# Altium PCB FPGA_Board.PcbDoc (part 6 of 10)
Units mm, origin at the board's own origin, x right, y up, seen from the top; angles counter-clockwise.
Board outline 103.63 x 86.08 mm, 2 copper layers (Top Layer, Bottom Layer); 109 components, 200 nets, 667 pads, 237 vias.
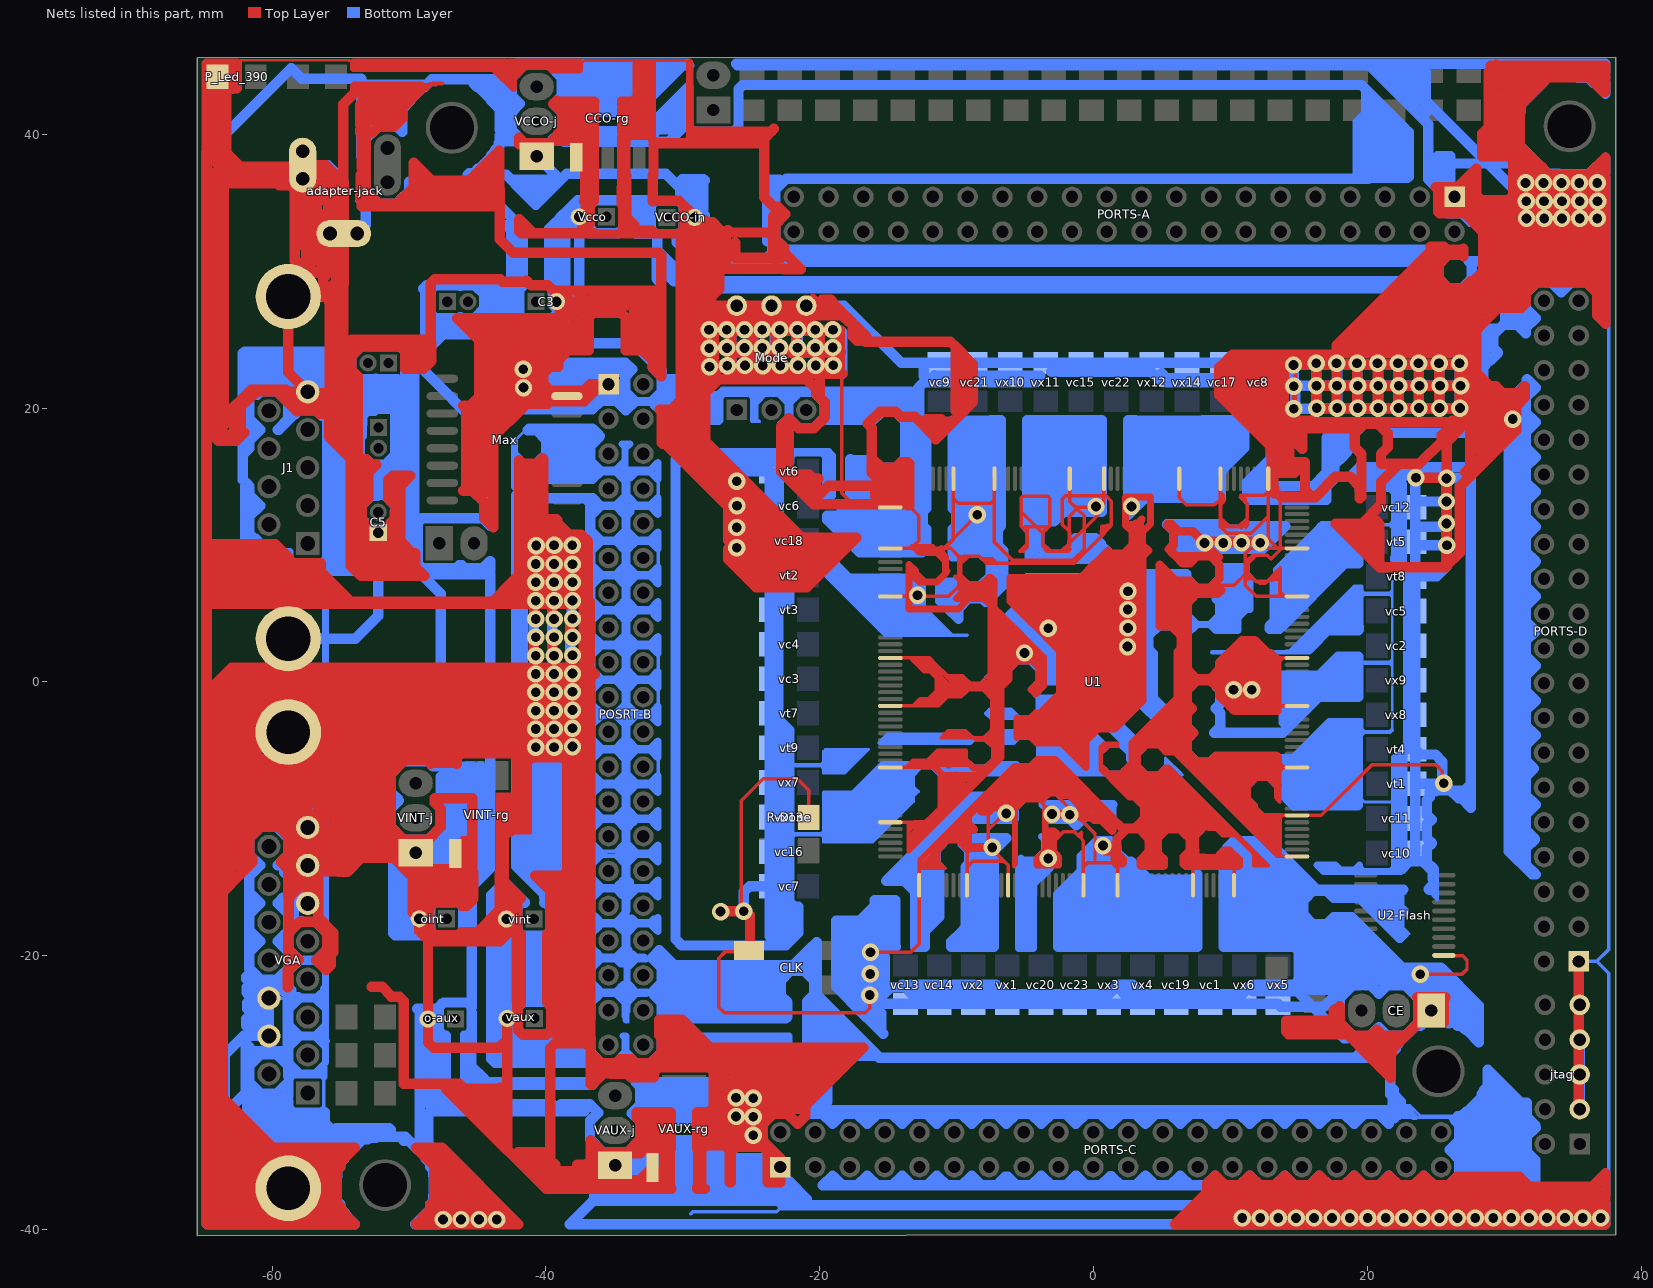
[diagram p6: the nets of this part, all layers, seen from the top]

## Via types
v1: diameter 1.27, hole 0.711, Top Layer to Bottom Layer, 237 vias

## Nets (pads, with @x,y where several pads share a name; then routed paths per layer and width w, separated by ;. In a path a pad name is that pad's centre, name@x,y a point inside that pad or via, vN(x,y) a via of type N, cw(c..) or ccw(c..) an arc to the next point about the centre after c; other vN are vias at no path point) (continued)
GND: (continued)
  Bottom Layer w0.254: VGA.11@-60.242,-23.095 -59.045,-23.095 -58.863,-22.913 -58.839,-22.889 -58.839,-22.841 -58.839,-20.943 -58.839,-19.707 -58.839,-18.742 -58.839,-18.173 -58.839,-16.937 -58.839,-16.422 -58.542,-16.125 -57.447,-16.125 VGA.6@-57.402,-16.17 ; VGA.17@-58.85,-3.693 VGA.17@-58.822,-3.665 ; -58.831,-30.611 -58.831,-29.173 ; -58.577,-30.341 -58.577,-29.038 ; -56.973,-31.195 -56.42,-31.195 -56.227,-31.002 -56.227,-29.038 -56.42,-28.845 ; -56.219,-28.848 -56.222,-28.845 -56.42,-28.845 ; v1(-41.645,21.497) -41.662,21.514 v1(-41.662,22.839) -41.176,22.353 -40.93,22.107 -35.786,22.107 POSRT-B.1@-35.429,21.75 ; -36.088,-18.022 -36.509,-18.443 -36.509,-19.337 -35.876,-19.97 -34.873,-19.97 -34.837,-20.006 -34.705,-20.138 ; VAUX-j.1@-34.95,-35.3 -34.95,-36.305 -34.95,-36.923 -34.491,-37.382 -33.967,-37.906 -33.86,-38.013 -24.381,-38.013 -24.274,-37.906 -23.423,-37.054 -22.882,-36.514 ; -33.969,-3.381 -33.969,-4.097 -33.336,-4.73 -32.352,-4.73 -31.924,-4.302 -31.834,-4.302 -31.809,-4.328 -31.809,-6.637 -32.149,-6.978 ; -33.642,-0.335 -33.969,-0.663 -33.969,-1.557 -33.336,-2.19 -32.352,-2.19 -32.096,-1.935 ; -33.633,14.914 -33.336,15.21 -32.442,15.21 -31.809,14.577 -31.809,13.503 -31.834,13.478 ; -33.561,2.285 -33.336,2.51 -32.442,2.51 -31.809,1.877 -31.809,0.237 -31.834,0.212 ; -33.467,10 -33.336,10.13 -32.442,10.13 -31.809,9.497 -31.809,8.603 -32.063,8.348 -32.063,8.169 ; -32.748,-0.03 -32.442,-0.03 -31.809,-0.663 -31.809,-1.557 -32.096,-1.845 -32.096,-1.935 ; -32.006,-1.935 -32.096,-1.935 ; -29.41,-38.85 -29.27,-38.71 -23.135,-38.71 -22.882,-38.457 -22.882,-38.028 -22.882,-37.378 ; PORTS-C.1@-22.882,-35.435 -22.882,-36.514 ; -17.314,-8.463 -15.085,-6.234 -12.779,-6.234 -12.635,-6.234 -12.537,-6.234 ; -7.885,-2.3 -7.592,-2.007 -6.033,-2.007 -5.882,-2.157 ; -3.397,-1.793 -3.856,-1.793 -3.903,-1.793 -4.084,-1.974 -4.675,-2.565 -5.221,-2.565 ; 14.878,8.896 16.62,10.638 16.62,11.085 16.62,11.28 16.62,11.639 19.612,11.639 19.766,11.485 21.966,11.485 22.372,11.485 ; 19.616,6.437 21.604,6.437 21.637,6.405 19.763,6.405 19.57,6.212 19.57,5.745 19.57,4.138 ; PORTS-A.1@26.36,35.429 27.896,35.429 29.47,33.855 29.979,33.346 ; 27.386,33.39 27.43,33.346 29.979,33.346 ; PORTS-D.1@35.433,-20.415 36.758,-20.415 ; 37.634,32.27 37.607,32.243 37.607,31.089 ; -58.831,-29.173 -58.712,-29.173 -58.577,-29.038 ; -58.831,-29.173 -58.831,-28.025 -58.831,-26.95 -58.831,-23.182 -58.59,-22.941 -58.574,-22.941 -58.574,-23.81 -58.574,-23.99 -58.577,-23.993 -58.577,-25.146 -58.577,-26.584 -58.577,-27.916 -58.577,-28.552 -58.577,-29.038 ; -58.577,-29.038 -58.384,-28.845 -56.42,-28.845 ; -22.882,-37.378 -22.882,-37.349 -22.882,-36.514 ; -22.882,-37.378 -22.299,-37.961 -21.898,-37.961 37.155,-37.961 37.631,-37.485 37.631,-21.288 36.758,-20.415 ; -5.882,-2.157 -5.882,-2.3 -5.882,-2.343 -5.882,-2.422 -5.847,-2.457 -5.619,-2.457 -5.583,-2.457 ; -5.882,-2.157 -5.74,-2.3 -5.583,-2.457 ; -5.583,-2.457 -5.475,-2.565 ; -5.475,-2.565 -5.221,-2.565 ; -5.475,-2.565 -5.449,-2.591 -5.425,-2.615 -5.171,-2.615 -5.195,-2.591 -5.221,-2.565 ; 19.57,4.138 19.57,3.787 19.596,3.76 ; 19.57,4.138 19.62,4.088 19.62,3.784 19.596,3.76 ; 19.596,3.76 19.57,3.734 19.57,3.687 19.62,3.737 19.596,3.76 ; 29.979,33.346 35.35,33.346 37.607,31.089 ; 36.758,-20.415 37.607,-19.566 37.607,31.089
  Bottom Layer w0.305: -36.778,-17.183 -36.535,-16.94 -36.535,-15.892 -35.887,-15.244 -34.971,-15.244 -34.506,-15.709 -34.506,-14.451 ; -35.641,0.136 -35.547,0.23 -35.109,0.23 ; -35.542,2.726 -35.352,2.536 ; -34.527,-0.255 -34.527,-0.049 -34.527,0.23 ; -34.486,2.446 -34.55,2.51 ; -34.323,11.597 -34.323,12.048 -34.971,12.696 -35.887,12.696 -36.535,12.048 -36.535,11.132 -36.193,10.79 -36.213,10.77 -36.234,10.77 -36.234,10.508 -36.234,10.132 -36.234,10.109 -36.535,9.809 -36.535,9.508 ; -33.564,2.971 -33.581,2.954 -33.772,2.763 -33.989,2.546 -33.999,2.536 -34.219,2.536 -34.55,2.536 ; -22.234,-11.048 -22.152,-11.131 -19.903,-11.131 -19.694,-10.922 -19.694,-8.083 -17.591,-8.083 -15.445,-5.937 -8.989,-5.937 -8.735,-6.191 -7.771,-6.191 -4.765,-6.191 -4.741,-6.167 -4.059,-5.485 -4.059,-4.665 -4.64,-4.084 -5.46,-4.084 -5.839,-4.463 -7.661,-4.463 -7.915,-4.209 -8.108,-4.209 ; -12.635,-6.234 -13.216,-6.815 -13.216,-6.887 -13.216,-7.635 -12.851,-8 -13.216,-8.365 -13.216,-8.724 -16.151,-11.659 -17.988,-11.659 -19.669,-11.659 -19.669,-11.353 -19.737,-11.286 -19.724,-11.286 -19.465,-11.027 -19.465,-8.301 -19.427,-8.263 -17.402,-8.263 -15.353,-6.214 -12.759,-6.214 -11.691,-6.214 -10.4,-6.214 -9.101,-6.214 -9.03,-6.285 -9.023,-6.292 -9.019,-6.296 -8.862,-6.296 -8.769,-6.389 -4.667,-6.389 -4.563,-6.285 -4.298,-6.02 ; -8.893,-4.057 -8.835,-4.116 -8.015,-4.116 ; -4.451,-6.02 -4.298,-6.02 ; 1.691,-6.641 1.935,-6.641 2.039,-6.537 ; 2.993,-5.023 3.269,-4.747 3.269,-4.646 ; 3.27,-4.646 3.503,-4.879 3.137,-5.245 2.892,-5.245 2.845,-5.198 2.686,-5.357 2.686,-5.415 2.686,-5.537 2.747,-5.476 2.76,-5.463 3.124,-5.463 3.309,-5.648 3.309,-5.29 3.785,-4.814 0.038,-1.067 -1.347,-1.067 -4.038,-1.067 -4.084,-1.114 -4.084,-1.974 -4.084,-2.01 -4.665,-2.591 -5.195,-2.591 -5.449,-2.591 -5.485,-2.591 -5.619,-2.457 -5.776,-2.3 -5.807,-2.268 -5.839,-2.3 -5.882,-2.343 -5.892,-2.353 -6.27,-2.353 -6.309,-2.392 -7.014,-2.392 -7.063,-2.343 -7.512,-2.343 -7.512,-2.3 -7.512,-2.285 -7.382,-2.155 -6.222,-2.155 -6.159,-2.092 -5.984,-2.092 -6.043,-2.033 -7.582,-2.033 -7.849,-2.3 -7.507,-2.642 0.228,-2.642 0.3,-2.642 2.008,-4.35 2.008,-4.732 2.516,-5.24 2.516,-5.245 2.516,-5.709 2.566,-5.759 3.03,-5.759 3.268,-5.759 3.309,-5.8 3.309,-5.987 3.258,-5.987 2.589,-5.987 2.359,-6.216 3.416,-6.216 3.608,-6.409 2.167,-6.409 2.039,-6.537 ; 15.77,2.137 8.689,2.137 8.663,2.163 14.255,2.163 14.697,2.605 15.02,2.605 15.915,2.605 ; 19.379,-3.605 19.429,-3.656 19.753,-3.656 ; 19.544,-2.787 19.544,-3.447 19.702,-3.605 19.753,-3.656 ; 21.767,-3.536 21.647,-3.656 19.753,-3.656 ; -36.535,1.888 -36.535,2.211 -36.535,3.189 -36.535,3.512 ; -36.535,1.888 -36.535,0.972 -35.887,0.324 -35.203,0.324 ; -36.535,1.888 -35.887,2.536 -35.352,2.536 ; -36.535,3.512 -36.535,4.428 ; -36.535,3.512 -35.887,2.864 -34.971,2.864 ; -36.535,4.428 -36.535,4.751 -36.535,5.703 -36.535,6.052 ; -36.535,4.428 -35.887,5.076 -34.971,5.076 -34.606,4.711 ; -36.535,6.052 -36.535,6.968 ; -36.535,6.052 -35.887,5.404 -34.914,5.404 -34.606,5.711 ; -36.535,6.968 -36.535,7.291 -36.535,8.269 -36.535,8.592 ; -36.535,6.968 -35.887,7.616 -34.971,7.616 -34.323,6.968 -34.323,5.995 -34.606,5.711 ; -36.535,8.592 -35.887,7.944 -34.971,7.944 -34.323,8.592 -34.323,9.508 -34.971,10.156 -35.887,10.156 -36.535,9.508 ; -36.535,8.592 -36.535,9.508 ; -35.887,-12.704 -35.558,-12.376 ; -35.887,-12.704 -36.535,-13.352 -36.535,-14.268 -35.887,-14.916 -35.885,-14.916 ; -35.887,-12.704 -34.971,-12.704 -34.323,-13.352 -34.323,-14.268 -34.506,-14.451 ; -35.885,-14.916 -36.047,-15.078 -36.411,-15.442 -36.407,-15.442 -36.1,-15.135 -35.82,-15.135 -35.665,-14.98 -35,-14.98 -35,-14.945 -34.971,-14.916 ; -35.885,-14.916 -34.971,-14.916 ; -35.558,-12.376 -35.887,-12.376 -36.535,-11.728 -36.535,-10.812 -35.887,-10.164 -34.971,-10.164 -34.323,-10.812 ; -35.558,-12.376 -34.971,-12.376 -34.323,-11.728 -34.323,-10.812 ; -35.352,2.536 -34.971,2.536 ; -35.203,0.324 -35.109,0.23 ; -35.203,0.324 -34.971,0.324 -34.527,0.768 ; -35.109,0.23 -34.527,0.23 ; -35.109,0.23 -34.323,-0.556 -34.323,-0.652 ; -34.971,-14.916 -34.763,-14.707 ; -34.971,-5.084 -34.971,-4.907 -34.971,-4.756 ; -34.971,-5.084 -35.887,-5.084 -36.535,-5.732 -36.535,-6.648 -35.887,-7.296 -34.971,-7.296 -34.559,-6.883 ; -34.971,-5.084 -34.323,-5.732 -34.323,-6.648 -34.559,-6.883 ; -34.971,-4.756 -34.323,-4.108 -34.323,-3.192 -34.971,-2.544 -35.559,-2.544 -35.645,-2.458 -35.731,-2.544 -35.887,-2.544 -36.535,-3.192 -36.535,-4.108 -35.887,-4.756 -34.971,-4.756 ; -34.971,2.536 -34.576,2.536 ; -34.971,2.536 -34.817,2.382 ; -34.971,2.864 -34.323,3.512 ; -34.971,2.864 -34.904,2.864 -34.803,2.763 -34.576,2.536 ; -34.817,2.382 -34.323,1.888 -34.323,0.972 -34.527,0.768 ; -34.817,2.382 -34.55,2.382 -34.55,2.51 ; -34.763,-14.707 -34.598,-14.543 ; -34.763,-14.707 -34.763,-15.201 -34.717,-15.247 -34.617,-15.147 -34.598,-15.147 -34.598,-14.543 ; -34.606,4.711 -34.606,5.625 -34.606,5.711 ; -34.606,4.711 -34.323,4.428 -34.323,3.512 ; -34.598,-14.543 -34.506,-14.451 ; -34.576,2.536 -34.55,2.51 ; -34.576,2.536 -34.55,2.536 ; -34.559,-8.037 -34.559,-7.725 -34.559,-6.883 ; -34.559,-8.037 -34.971,-7.624 -35.887,-7.624 -36.535,-8.272 -36.535,-9.188 -35.887,-9.836 -34.971,-9.836 -34.323,-9.188 ; -34.559,-8.037 -34.323,-8.272 -34.323,-9.188 ; -34.55,2.51 -34.55,2.536 ; -34.55,2.536 -34.55,2.763 -34.55,3.002 -34.323,3.229 -34.323,3.512 ; -34.527,0.23 -34.527,0.768 ; -34.323,-10.812 -34.323,-10.496 -34.323,-9.188 ; -34.323,-0.652 -34.971,-0.004 -35.887,-0.004 -36.535,-0.652 -36.535,-1.568 -35.887,-2.216 -34.971,-2.216 -34.323,-1.568 -34.323,-0.652 ; -15.568,-4.384 -8.91,-4.384 ; -15.568,-4.384 -15.437,-4.254 ; -15.568,-4.384 -15.647,-4.463 -8.989,-4.463 -8.91,-4.384 ; -15.437,-4.254 -9.013,-4.254 -8.907,-4.148 -8.907,-4.043 -15.227,-4.043 ; -15.437,-4.254 -15.227,-4.043 ; -15.227,-4.043 -15.045,-3.862 -9.165,-3.862 ; -9.165,-3.862 -9.106,-3.921 -9.03,-3.921 -9.089,-3.862 -9.165,-3.862 ; -8.91,-4.384 -8.735,-4.209 -8.108,-4.209 ; -8.108,-4.209 -8.015,-4.116 ; -8.015,-4.116 -7.507,-3.608 -7.211,-3.608 -7.211,-3.659 -7.648,-4.096 -7.648,-4.161 -7.561,-4.248 -7.555,-4.242 -5.945,-4.242 -5.686,-3.983 -5.677,-3.974 -6.365,-3.974 -7.374,-3.974 -7.041,-3.641 ; -7.041,-3.641 -7.065,-3.618 -7.065,-3.608 -5.687,-3.608 -5.586,-3.709 -5.397,-3.898 -4.743,-3.898 -4.658,-3.983 -3.958,-4.683 -3.886,-4.755 -3.886,-5.608 -4.298,-6.02 ; -7.041,-3.641 -6.913,-3.77 -6.907,-3.776 -6.563,-3.776 -5.659,-3.776 -5.726,-3.709 -5.811,-3.624 -7.024,-3.624 -7.041,-3.641 ; -4.298,-6.02 -3.976,-6.02 -1.666,-6.02 -0.261,-6.02 0.191,-6.02 0.433,-6.02 0.494,-6.02 1.115,-6.641 1.576,-6.641 1.678,-6.742 6.36,-6.742 5.291,-5.673 5.291,-5.972 5.807,-6.488 5.932,-6.488 5.969,-6.525 5.496,-6.525 5.186,-6.215 4.993,-6.407 5.086,-6.407 5.249,-6.57 4.831,-6.57 4.71,-6.691 3.89,-6.691 3.736,-6.537 2.039,-6.537
  Bottom Layer w0.508: -61.348,9.631 -60.896,9.631 ; -58.813,-28.408 -58.669,-28.552 -58.577,-28.552 -57.941,-28.552 ; -58.549,-21.016 -57.941,-20.408 ; -58.067,8.808 -58.436,8.808 ; -56.219,-28.848 -56.219,-27.909 ; -48.892,-34.882 -48.574,-35.2 -48.574,-35.323 -48.574,-35.476 -48.466,-35.584 -48.456,-35.594 ; -48.456,-35.427 -48.456,-35.594 ; -46.529,-30.747 -45.798,-30.747 -45.76,-30.709 -39.476,-30.709 -39.311,-30.874 -46.178,-30.874 ; -45.415,-23.028 -45.537,-23.15 -45.537,-23.631 -45.537,-25.439 -45.805,-25.707 -46.035,-25.707 -46.035,-29.409 -45.903,-29.541 -36.582,-29.541 -36.15,-29.109 -44.231,-29.109 ; -45.288,-24.11 -45.288,-25.81 ; -45.188,-28.152 -44.615,-28.725 ; -42.287,17.601 -42.287,15.41 -42.178,15.301 ; -40.132,-15.9 -40.132,-16.116 -40.132,-16.185 -39.806,-16.511 -39.806,-18.319 -39.806,-18.365 -39.806,-18.824 -39.806,-21.651 -39.913,-21.759 -40.392,-22.237 -41.129,-22.974 -41.482,-23.327 -41.52,-23.366 -41.915,-23.761 -41.915,-25.389 -41.52,-25.784 -41.445,-25.859 -39.178,-25.859 -38.494,-25.859 -38.367,-25.986 -37.748,-26.605 -37.234,-27.119 -36.636,-27.717 -36.439,-27.717 ; -37.268,13.541 -36.547,13.541 -35.929,12.923 -34.929,12.923 -34.597,13.255 ; -36.658,-5.023 -36.658,-5.532 -36.658,-6.668 -35.929,-7.397 -34.887,-7.397 -34.559,-7.725 -34.227,-8.057 -34.219,-8.057 ; -36.562,-9.908 -36.349,-9.908 -35.958,-9.908 -35.929,-9.937 -34.929,-9.937 -34.726,-9.734 -34.497,-9.734 -34.759,-9.996 -34.775,-9.996 -34.775,-10.044 -34.323,-10.496 -34.222,-10.597 -34.222,-11.77 -34.592,-12.14 -34.592,-12.483 -34.711,-12.602 -34.219,-13.094 ; -36.493,-4.837 -36.493,-4.622 -36.636,-4.479 -36.636,-4.33 -36.636,-3.15 -35.929,-2.443 -34.763,-2.443 ; -36.441,-4.846 -36.38,-4.907 -36.059,-4.907 -34.971,-4.907 -34.614,-4.907 ; -36.405,-18.158 -36.248,-18.002 ; -36.385,-17.102 -36.22,-17.267 ; -36.313,-20.606 -36.636,-20.93 -36.636,-21.93 -36.219,-22.347 ; -36.188,15.721 -35.929,15.463 -34.929,15.463 ; -35.711,10.383 -34.929,10.383 -34.575,10.737 ; -35.629,7.843 -34.929,7.843 -34.579,8.192 ; -35.536,5.303 -34.929,5.303 -34.606,5.625 -34.222,6.01 -34.222,7.01 -34.579,7.368 -34.579,8.192 ; -35.466,2.715 -35.418,2.763 -34.803,2.763 -34.55,2.763 -34.219,2.763 ; -34.772,0.196 -34.527,-0.049 -34.222,-0.354 -34.222,-1.61 -34.527,-1.915 -34.527,-2.181 -34.562,-2.146 -34.763,-2.347 -34.763,-2.443 ; -34.705,-20.138 -34.319,-20.138 -34.222,-20.041 -34.222,-19.892 -34.314,-19.8 -34.632,-19.8 ; -34.594,-22.302 -34.382,-22.09 -34.275,-22.09 -34.275,-22.124 -33.989,-22.41 -33.793,-22.606 -33.793,-22.393 -33.726,-22.326 ; -34.169,-27.145 -34.174,-27.15 -34.361,-27.15 ; -34.143,-24.69 -34.143,-24.101 ; -34.096,-14.31 -34.096,-13.31 -33.989,-13.203 -33.629,-12.843 ; -34.096,-10.77 -34.096,-11.77 -33.989,-11.877 -33.389,-12.477 -32.389,-12.477 -31.834,-11.922 -31.834,-13.158 -32.223,-12.769 ; -33.989,-14.417 -33.83,-14.576 -33.83,-15.132 -33.715,-15.017 -32.221,-15.017 -32.214,-15.01 -32.214,-14.842 -31.834,-14.462 -31.834,-15.698 -32.389,-15.143 -33.389,-15.143 -33.989,-15.743 -34.096,-15.85 ; -33.989,-10.663 -33.811,-10.485 -33.811,-10.021 -33.579,-10.253 -33.389,-10.063 -32.369,-10.063 -32.167,-10.265 -32.167,-10.285 -31.834,-10.618 -31.834,-9.382 -32.389,-9.937 -33.389,-9.937 -33.989,-9.337 -34.096,-9.23 -34.096,-8.23 -33.989,-8.123 -33.801,-7.935 ; -33.772,2.763 -33.989,2.763 -34.219,2.763 ; -33.721,-17.226 -33.958,-17.226 -33.989,-17.257 -34.368,-17.636 -34.492,-17.636 -34.492,-17.573 -34.718,-17.347 ; -25.158,16.816 -19.342,16.816 -19.207,16.681 ; -22.234,16.517 -22.062,16.689 -22.019,16.732 -19.861,16.732 -19.593,16.464 -19.593,13.435 -19.217,13.435 -19.059,13.592 -19.059,16.533 -19.207,16.681 ; -19.363,13.711 -19.207,13.867 -19.207,16.681 ; -15.001,6.16 -15.001,6.097 -14.808,5.904 ; -13.366,-6.401 -12.946,-6.401 -12.779,-6.234 -12.759,-6.214 -12.677,-6.133 -11.773,-6.133 -11.691,-6.214 -11.62,-6.285 -11.265,-6.641 -11.115,-6.641 -10.966,-6.492 -9.142,-6.492 -8.993,-6.641 ; v1(-12.866,6.339) v1@-12.484,5.957 ; -11.097,-6.641 -8.993,-6.641 ; v1(-5.046,2.11) -4.526,2.63 -4.094,3.062 -3.539,3.617 -3.32,3.836 v1(-3.32,3.911) ; v1(-3.324,-12.891) -2.917,-12.484 -2.917,-12.377 ; v1(2.769,12.818) 3.264,13.313 3.623,13.313 9.412,13.313 9.412,13.861 9.285,13.988 8.451,14.822 ; 7.066,3.865 7.246,3.865 7.573,4.192 8.477,4.192 8.931,3.738 10.542,3.738 10.533,3.748 10.533,4.652 11.173,5.292 11.437,5.292 11.437,7.594 11.183,7.848 11.183,8.416 11.158,8.441 9.117,8.441 9.117,7.573 8.863,7.319 8.863,6.006 9.117,5.752 9.117,4.848 8.703,4.433 ; 7.454,4.326 7.573,4.208 8.477,4.208 8.687,4.417 ; 8.731,-5.513 13.21,-5.513 ; 14.665,-6.968 13.961,-6.264 13.51,-5.813 13.337,-5.64 13.21,-5.513 ; 15.037,-5.049 14.572,-5.513 14.357,-5.513 13.21,-5.513 ; 19.062,6.126 19.304,6.126 19.316,6.137 19.616,6.437 ; 22.412,-13.739 22.294,-13.857 21.689,-13.857 ; vt4.1@22.834,-4.156 22.834,-4.742 22.067,-5.509 21.957,-5.509 21.957,-8.785 21.957,-13.589 21.689,-13.857 ; -60.896,9.631 -60.878,9.649 -60.48,9.649 -60.414,9.649 -60.357,9.706 ; -60.896,9.631 -61.177,9.35 -60.517,9.35 ; -60.896,9.631 -60.798,9.631 -60.517,9.35 ; -60.691,10.04 -60.871,10.04 -61.006,10.04 -61.159,9.887 -61.159,10.328 -61.159,10.57 -60.781,10.193 -60.759,10.193 -60.759,10.108 -60.691,10.04 ; -60.691,10.04 -60.357,9.706 ; -60.517,9.35 -60.218,9.35 -60.175,9.307 -59.681,9.307 -59.773,9.399 -59.9,9.526 ; -60.357,9.706 -60.177,9.526 -59.9,9.526 ; -59.9,9.526 -59.569,9.526 ; -59.569,9.526 -58.704,9.526 -58.704,9.076 ; -59.569,9.526 -59.222,9.179 -58.953,9.179 -58.941,9.191 -58.82,9.191 -58.704,9.076 ; -58.704,9.076 -58.436,8.808 ; -58.436,8.808 -58.309,8.681 -57.744,8.115 -56.1,6.471 -56.1,3.155 -56.1,-18.252 ; -58.281,-17.977 -58.281,-17.207 ; -58.281,-17.977 -57.941,-17.638 -56.863,-17.638 -56.1,-18.401 ; -58.281,-17.977 -58.704,-18.401 -58.704,-19.479 -57.941,-20.242 ; -58.281,-17.207 -58.281,-16.322 -58.44,-16.322 -58.599,-16.481 -58.403,-16.481 -58.348,-16.536 -58.348,-17.14 -58.281,-17.207 ; -58.281,-17.207 -58.134,-17.354 -57.817,-17.354 -57.694,-17.477 -56.906,-17.477 -56.808,-17.379 -56.344,-17.379 -56.375,-17.41 -56.375,-17.483 -56.436,-17.544 -56.436,-17.916 -56.1,-18.252 ; -58.196,-26.203 -57.941,-25.948 -57.14,-25.948 ; -58.196,-26.203 -58.242,-26.157 -58.242,-25.571 -58.153,-25.571 ; -58.196,-26.203 -58.577,-26.584 -58.704,-26.711 -58.704,-27.789 -58.577,-27.916 -57.941,-28.552 ; -58.18,-23.416 -57.941,-23.178 -56.863,-23.178 -56.1,-23.941 ; -58.18,-23.416 -58.226,-23.416 -58.226,-23.111 -58.34,-22.997 -58.247,-22.904 -58.05,-22.904 -57.941,-23.012 -56.754,-23.012 -56.515,-22.773 -56.318,-22.97 -56.318,-23.248 -56.256,-23.31 -56.256,-22.406 -56.1,-22.249 ; -58.18,-23.416 -58.574,-23.81 -58.704,-23.941 -58.704,-25.019 -58.577,-25.146 -58.153,-25.571 ; -58.153,-25.571 -57.941,-25.782 -57.306,-25.782 ; -57.941,-28.552 -56.863,-28.552 ; -57.941,-20.408 -57.456,-20.408 ; -57.941,-20.408 -58.252,-20.408 -58.318,-20.342 -58.218,-20.242 -57.941,-20.242 ; -57.941,-20.242 -57.622,-20.242 ; -57.622,-20.242 -56.863,-20.242 -56.1,-19.479 ; -57.622,-20.242 -57.456,-20.408 ; -57.456,-20.408 -56.863,-20.408 -56.438,-20.833 ; -57.306,-25.782 -57.166,-25.782 ; -57.306,-25.782 -57.236,-25.852 ; -57.236,-25.852 -57.166,-25.782 ; -57.236,-25.852 -57.14,-25.948 ; -57.166,-25.782 -56.863,-25.782 ; -57.14,-25.948 -56.863,-25.948 -56.1,-26.711 ; -56.863,-28.552 -56.244,-27.933 ; -56.863,-28.552 -56.497,-28.552 -56.419,-28.63 -56.244,-28.455 -56.244,-27.933 ; -56.863,-25.782 -56.277,-25.197 ; -56.863,-25.782 -56.678,-25.782 ; -56.678,-25.782 -56.472,-25.782 -56.1,-26.154 ; -56.678,-25.782 -56.451,-25.555 -56.277,-25.729 -56.277,-25.197 ; -56.438,-20.833 -56.1,-21.171 ; -56.438,-20.833 -56.438,-19.873 -56.1,-19.535 ; -56.277,-25.197 -56.1,-25.019 ; -56.244,-27.933 -56.219,-27.909 ; -56.219,-27.909 -56.1,-27.789 -56.1,-26.711 ; -56.1,-26.711 -56.1,-26.286 ; -56.1,-26.286 -56.1,-26.154 ; -56.1,-26.286 -56.034,-26.22 -56.1,-26.154 ; -56.1,-26.154 -56.1,-25.019 ; -56.1,-25.019 -56.1,-23.941 ; -56.1,-23.941 -56.1,-22.249 ; -56.1,-22.249 -56.1,-21.171 ; -56.1,-21.171 -56.1,-19.535 ; -56.1,-19.535 -56.1,-19.479 ; -56.1,-19.479 -56.1,-18.401 ; -56.1,-18.401 -56.1,-18.252 ; -48.456,-35.594 -48.379,-35.671 ; -48.379,-37.907 -48.379,-37.492 -48.313,-37.426 ; -48.379,-37.907 -48.313,-37.841 ; -48.379,-37.907 -48.574,-38.102 -48.574,-38.379 -48.313,-38.117 -48.313,-37.841 ; -48.379,-35.671 -48.313,-35.737 -48.313,-36.12 ; -48.379,-35.671 -48.379,-36.054 -48.313,-36.12 ; -48.313,-37.841 -48.313,-37.426 ; -48.313,-37.426 -48.313,-37.058 -48.313,-36.12 ; -45.288,-25.81 -45.288,-26.417 -45.323,-26.452 -45.323,-28.725 -44.615,-28.725 ; -45.288,-25.81 -45.69,-26.212 -45.69,-29.092 -45.627,-29.029 -45.627,-28.984 -45.502,-29.109 -44.231,-29.109 ; -44.615,-28.725 -44.231,-29.109 ; -36.439,-27.717 -36.109,-27.717 -35.631,-27.717 ; -36.439,-27.717 -36.536,-27.814 -36.663,-27.941 -35.407,-27.941 ; -36.248,-18.002 -36.248,-17.295 -36.22,-17.267 ; -36.248,-18.002 -35.929,-17.683 -34.929,-17.683 -34.373,-18.239 ; -36.22,-17.267 -35.929,-17.557 -34.929,-17.557 -34.718,-17.347 ; -36.219,-22.347 -36.272,-22.347 -36.272,-23.052 -36.3,-23.08 -36.246,-23.08 -35.929,-22.763 -34.929,-22.763 -34.59,-23.102 -34.59,-23.014 -34.366,-23.014 -34.356,-23.004 -34.143,-23.217 -34.143,-24.101 ; -36.219,-22.347 -35.929,-22.637 -34.929,-22.637 ; -35.631,-27.717 -35.407,-27.941 ; -35.631,-27.717 -34.929,-27.717 ; -35.407,-27.941 -32.613,-27.941 ; -34.929,-27.717 -34.791,-27.579 ; -34.929,-27.717 -34.233,-27.717 ; -34.929,-22.637 -34.779,-22.487 -34.601,-22.487 ; -34.929,-22.637 -34.751,-22.637 -34.601,-22.487 ; -34.929,15.463 -34.219,15.463 ; -34.929,15.463 -34.222,16.17 -34.222,17.17 -34.443,17.391 -33.875,17.391 -34.219,17.047 -34.219,15.463 ; -34.791,-27.579 -34.095,-27.579 ; -34.791,-27.579 -34.361,-27.15 ; -34.763,-2.443 -34.271,-2.443 -34.219,-2.391 ; -34.763,-2.443 -34.763,-2.496 -34.222,-3.037 -34.222,-4.15 -34.614,-4.542 -34.614,-4.907 ; -34.718,-17.347 -34.222,-16.85 ; -34.632,-19.8 -34.372,-19.54 ; -34.632,-19.8 -34.837,-20.006 -34.929,-20.097 -35.929,-20.097 -36.329,-19.697 -36.329,-20.118 -36.284,-20.163 -36.284,-20.578 -35.929,-20.223 -34.929,-20.223 -34.561,-20.591 -34.281,-20.591 -33.989,-20.299 -33.808,-20.118 -33.808,-20.036 -33.629,-19.857 -33.389,-20.097 -32.824,-20.097 -32.709,-20.212 -32.709,-20.223 -33.389,-20.223 -33.989,-20.823 -34.096,-20.93 -34.096,-21.93 -33.989,-22.037 -33.726,-22.3 -33.726,-22.326 ; -34.614,-4.907 -34.614,-5.092 -34.219,-5.487 ; -34.614,-4.907 -34.219,-4.907 ; -34.601,-22.487 -34.469,-22.619 -34.262,-22.619 -33.989,-22.892 -33.946,-22.935 -33.946,-23.32 ; -34.597,13.255 -34.597,12.465 -34.222,12.09 -34.222,11.09 -34.575,10.737 ; -34.597,13.255 -34.222,13.63 -34.222,14.415 -34.222,14.703 -34.219,14.706 ; -34.579,8.192 -34.222,8.55 -34.222,9.55 -34.575,9.903 -34.575,10.737 ; -34.373,-18.239 -34.222,-18.39 -34.222,-19.39 -34.372,-19.54 ; -34.373,-18.239 -34.373,-18.187 -33.989,-17.803 -33.714,-17.528 -33.595,-17.409 -33.538,-17.409 -33.389,-17.557 -32.389,-17.557 -32.142,-17.311 -32.12,-17.333 -32.12,-17.457 -31.865,-17.202 -31.834,-17.202 -31.834,-18.238 -32.389,-17.683 -33.389,-17.683 -33.989,-18.283 -34.096,-18.39 -34.096,-19.39 -33.989,-19.497 -33.946,-19.54 -33.989,-19.54 -34.372,-19.54 ; -34.361,-27.15 -34.222,-27.01 -34.222,-26.01 -34.373,-25.859 -34.154,-25.859 -34.154,-26.952 -33.389,-27.717 ; -34.233,-27.717 -34.095,-27.579 ; -34.233,-27.717 -33.389,-27.717 ; -34.222,-16.85 -34.222,-15.976 -34.219,-15.973 ; -34.222,-16.85 -34.219,-16.847 ; -34.219,-16.847 -34.219,-15.973 ; -34.219,-16.847 -34.096,-16.724 -34.096,-15.85 ; -34.219,-15.973 -34.219,-13.094 ; -34.219,-15.973 -34.096,-15.85 ; -34.219,-13.094 -34.219,-8.057 ; -34.219,-8.057 -34.219,-5.487 ; -34.219,-5.487 -34.219,-4.907 ; -34.219,-5.487 -34.096,-5.61 -34.096,-5.69 ; -34.219,-4.907 -34.219,-2.391 ; -34.219,-4.907 -33.989,-4.907 -33.824,-4.907 ; -34.219,-2.391 -34.219,0.537 ; -34.219,0.537 -34.219,2.536 -34.219,2.763 ; -34.219,0.537 -33.989,0.537 -33.703,0.537 ; -34.219,2.763 -34.219,14.412 -34.219,14.706 ; -34.219,14.706 -34.219,15.157 ; -34.219,14.706 -34.67,15.157 -34.219,15.157 ; -34.219,14.706 -34.096,14.583 -34.096,14.289 -34.096,13.63 -33.989,13.523 -33.389,12.923 -32.389,12.923 -31.834,13.478 -31.834,12.242 -32.4,12.808 -33.793,12.808 -33.79,12.805 -33.79,12.397 -33.989,12.197 -34.096,12.09 -34.096,11.09 -33.989,10.983 -33.389,10.383 -32.389,10.383 -31.834,10.938 -31.834,9.702 -32.199,10.068 -32.199,10.098 -32.075,10.222 -32.354,10.222 -32.389,10.257 -33.389,10.257 -33.662,9.985 -33.662,10.288 -33.78,10.406 -33.865,10.321 -33.865,9.781 -33.989,9.657 -34.096,9.55 -34.096,8.55 -33.989,8.443 -33.389,7.843 -32.389,7.843 -32.063,8.169 -31.834,8.398 -31.834,7.162 -32.15,7.478 ; -34.219,15.157 -34.219,15.463 ; -34.219,15.157 -34.105,15.157 -33.837,14.889 -33.389,15.337 -32.389,15.337 -31.834,14.782 -31.834,16.018 -32.389,15.463 -34.219,15.463 ; -34.143,-24.101 -34.096,-24.055 -34.096,-23.47 -33.989,-23.363 -33.946,-23.32 ; -34.096,-5.69 -33.989,-5.583 -33.824,-5.418 ; -34.096,-5.69 -34.096,-6.69 -33.989,-6.797 -33.389,-7.397 -32.389,-7.397 -31.834,-6.842 -31.834,-8.078 -32.389,-7.523 -33.389,-7.523 -33.576,-7.71 ; -34.095,-27.579 -34.075,-27.559 -33.918,-27.559 -33.898,-27.579 -34.095,-27.579 ; -33.946,-23.32 -33.389,-22.763 -32.665,-22.763 -32.593,-22.691 -32.593,-22.637 -33.415,-22.637 -33.726,-22.326 ; -33.85,2.176 -33.85,2.609 -33.634,2.393 ; -33.85,2.176 -33.634,2.393 ; -33.85,2.176 -33.989,2.037 -34.096,1.93 -34.096,0.93 -33.989,0.823 -33.703,0.537 ; -33.824,-5.418 -33.824,-4.907 ; -33.824,-5.418 -33.569,-5.162 ; -33.824,-4.907 -33.569,-5.162 ; -33.801,-7.935 -33.801,-7.466 -33.576,-7.691 -33.576,-7.71 ; -33.801,-7.935 -33.576,-7.71 ; -33.798,-2.852 -33.728,-2.781 ; -33.798,-2.852 -33.989,-3.043 -34.096,-3.15 -34.096,-4.15 -33.989,-4.257 -33.389,-4.857 -32.389,-4.857 -31.834,-4.302 -31.834,-5.538 -32.207,-5.165 ; -33.798,-2.852 -33.798,-2.33 -33.728,-2.4 -33.728,-2.781 ; -33.779,7.328 -33.78,7.329 -33.78,7.759 -33.564,7.543 ; -33.779,7.328 -33.564,7.543 ; -33.779,7.328 -33.989,7.117 -34.096,7.01 -34.096,6.01 -33.989,5.903 -33.389,5.303 -32.389,5.303 -31.834,5.858 -31.834,4.622 -32.115,4.903 -32.115,5.029 -32.263,5.177 -33.389,5.177 -33.672,4.895 -33.789,5.012 -33.789,5.279 -33.819,5.249 -33.819,4.747 -33.989,4.577 -34.096,4.47 -34.096,3.47 -33.989,3.363 -33.581,2.954 -33.389,2.763 -32.389,2.763 -31.834,3.318 -31.834,2.082 -32.207,2.455 ; -33.728,-2.781 -33.389,-2.443 -32.389,-2.443 ; -33.703,0.537 -33.389,0.223 -32.389,0.223 -31.834,0.778 -31.834,0.212 -31.834,-0.458 -32.172,-0.12 -32.172,-0.038 -32.307,0.097 -33.389,0.097 -33.637,-0.15 -33.637,0.004 -33.837,0.204 -33.837,-0.351 -33.989,-0.503 -34.096,-0.61 -34.096,-1.61 -33.989,-1.717 -33.389,-2.317 -32.389,-2.317 -32.006,-1.935 -31.834,-1.762 -31.834,-2.998 -32.102,-2.73 ; -33.634,2.393 -33.389,2.637 -32.389,2.637 ; -33.629,-12.843 -33.83,-12.642 -33.83,-12.483 -33.71,-12.603 -33.389,-12.603 ; -33.629,-12.843 -33.389,-12.603 ; -33.569,-5.162 -33.389,-4.983 -32.389,-4.983 -32.233,-5.139 ; -33.564,7.543 -33.389,7.717 -32.389,7.717 -32.256,7.584 ; -33.389,-27.717 -32.389,-27.717 ; -33.389,-12.603 -32.389,-12.603 ; -32.613,-27.941 -26.129,-27.941 ; -32.613,-27.941 -32.389,-27.717 ; -32.389,-27.717 -32.211,-27.539 ; -32.389,-12.603 -32.223,-12.769 ; -32.389,-12.603 -32.384,-12.603 -32.223,-12.764 -32.223,-12.769 ; -32.389,-2.443 -32.102,-2.73 ; -32.389,-2.443 -32.208,-2.443 -32.102,-2.549 -32.102,-2.73 ; -32.389,2.637 -32.207,2.455 ; -32.389,2.637 -32.379,2.637 -32.207,2.465 -32.207,2.455 ; -32.256,7.584 -32.15,7.584 -32.15,7.478 ; -32.256,7.584 -32.15,7.478 ; -32.233,-5.139 -32.207,-5.139 -32.207,-5.165 ; -32.233,-5.139 -32.207,-5.165 ; -32.211,-27.539 -31.616,-27.539 -31.616,-26.497 -31.409,-26.29 -27.78,-26.29 ; -32.211,-27.539 -31.682,-27.01 -31.682,-26.01 -31.776,-25.916 ; -31.776,-25.916 -31.833,-25.859 -31.776,-25.859 ; -31.776,-25.916 -31.776,-25.859 ; -31.776,-25.859 -28.211,-25.859 ; -28.211,-25.859 -27.78,-26.29 ; -28.211,-25.859 -22.232,-25.859 -22.232,-31.783 -22.377,-31.638 ; -27.78,-26.29 -27.298,-26.772 ; -27.78,-26.29 -22.692,-26.29 -22.682,-26.3 -22.682,-27.657 ; -27.298,-26.772 -26.914,-27.156 ; -27.298,-26.772 -23.095,-26.772 -23.006,-26.683 -23.006,-27.373 ; -27.298,-26.772 -31.222,-26.772 -31.222,-27.441 -31.301,-27.52 -31.164,-27.657 -26.413,-27.657 ; -26.914,-27.156 -26.531,-27.539 ; -26.914,-27.156 -23.223,-27.156 -23.006,-27.373 ; -26.914,-27.156 -30.829,-27.156 -30.966,-27.293 -30.72,-27.539 -26.531,-27.539 ; -26.531,-27.539 -26.413,-27.657 ; -26.531,-27.539 -22.967,-27.539 -23.006,-27.5 -23.006,-27.373 ; -26.413,-27.657 -26.129,-27.941 ; -26.413,-27.657 -23.41,-27.657 -22.829,-28.238 -22.593,-28.238 -22.682,-28.149 -22.682,-27.657 ; -26.129,-27.941 -23.359,-27.941 -22.417,-28.883 -22.417,-31.598 ; -23.006,-27.373 -22.722,-27.657 -22.682,-27.657 ; -22.682,-27.657 -22.377,-27.657 -22.377,-31.638 ; -22.417,-31.598 -22.377,-31.638 ; -22.417,-31.598 -22.417,-31.653 -22.377,-31.693 -22.377,-31.638 ; -14.808,5.904 -13.965,5.904 -13.901,5.84 -14.016,5.725 -14.016,5.303 -14.207,5.303 -14.808,5.904 ; -14.808,5.904 -15.091,5.904 -14.401,5.214 -14.284,5.214 -14.13,5.06 -13.824,5.06 -13.824,6.135 -13.913,6.224 -15.065,6.224 -15.845,6.224 -14.451,4.83 -13.389,4.83 -13.53,4.971 -13.53,6.442 -13.645,6.557 -15.398,6.557 -16.6,6.557 -14.732,4.689 -14.451,4.689 -14.221,4.459 -12.903,4.459 -13.21,4.766 -13.21,6.928 -15.769,6.928 -17.667,6.928 -17.675,6.928 -17.649,6.902 -17.641,6.902 -17.368,6.902 -14.834,4.368 -14.605,4.139 -12.186,4.139 -12.415,4.368 -12.903,4.856 -12.903,7.184 -13.031,7.312 -16.153,7.312 -17.88,7.312 -19.287,8.719 -19.373,8.633 -19.505,8.501 -19.505,8.335 -19.351,8.335 -14.822,3.806 -11.418,3.806 -11.98,4.368 -12.484,4.872 -12.484,5.383 ; -12.484,5.383 v1@-12.484,5.957 ; -12.484,5.383 -11.469,4.368 -10.639,3.538 -15.195,3.538 -19.593,7.936 -19.593,8.854 -19.593,9.432 -17.797,7.636 -16.477,7.636 -12.706,7.636 -12.484,7.415 v1@-12.484,5.957 ; -8.993,-6.641 -1.182,-6.641 ; -8.777,-6.292 -8.784,-6.285 -9.031,-6.038 -10.576,-6.038 -10.4,-6.214 -10.329,-6.285 -10.322,-6.292 -9.023,-6.292 -8.777,-6.292 ; -8.777,-6.292 -7.873,-6.292 ; -7.873,-6.292 -7.866,-6.285 -7.771,-6.191 -7.619,-6.038 -5.631,-6.038 -5.502,-6.167 -4.741,-6.167 -4.598,-6.167 ; -7.873,-6.292 -4.723,-6.292 -4.716,-6.285 -4.598,-6.167 ; -4.619,-3.709 -3.793,-4.535 -3.793,-5.811 -3.78,-5.824 -3.976,-6.02 -4.191,-6.235 -4.262,-6.235 -4.217,-6.28 -1.406,-6.28 ; -4.619,-3.709 -3.977,-3.709 ; -4.619,-3.709 -5.586,-3.709 -5.726,-3.709 -6.63,-3.709 -6.563,-3.776 -6.365,-3.974 -6.356,-3.983 -5.686,-3.983 -4.658,-3.983 -4.598,-3.983 -3.958,-4.623 -3.958,-4.683 -3.958,-5.527 -4.451,-6.02 -4.598,-6.167 ; -4.349,-13.734 -4.009,-13.394 -3.773,-13.394 -3.773,-13.472 -3.644,-13.601 -3.777,-13.734 ; -4.349,-13.734 -4.759,-14.144 -4.897,-14.006 -4.897,-13.798 -4.656,-13.798 -4.592,-13.734 -4.349,-13.734 ; -4.349,-13.734 -3.777,-13.734 ; -3.977,-3.709 -0.142,-3.709 0.89,-4.741 0.433,-5.198 ; -3.977,-3.709 -3.613,-4.073 ; -3.777,-13.734 -4.537,-14.494 -4.774,-14.494 -4.799,-14.519 -4.799,-19.17 -5.065,-19.17 -5.1,-19.205 -5.174,-19.131 -5.174,-13.399 -4.207,-13.399 -3.284,-12.476 -3.284,-11.475 -2.92,-11.475 -2.917,-11.473 ; -3.777,-13.734 -3.738,-13.734 -3.529,-13.943 ; -3.613,-4.073 -0.02,-4.073 -0.02,-4.284 0.455,-4.759 0.455,-5.153 0.433,-5.175 0.433,-5.198 ; -3.613,-4.073 -3.832,-4.073 -3.447,-4.458 -3.447,-5.85 -1.836,-5.85 ; -3.613,-4.073 -3.139,-4.547 ; -3.529,-13.943 -2.663,-13.078 -2.663,-12.631 -2.917,-12.377 ; -3.529,-13.943 -4.388,-14.803 -4.388,-19.463 -5.484,-19.463 -5.484,-13.069 -5.292,-12.877 -5.152,-13.017 -4.248,-13.017 -3.608,-12.377 -3.608,-11.473 -3.796,-11.284 -2.729,-11.284 -2.917,-11.473 ; -3.139,-4.547 -3.139,-4.425 -3.075,-4.361 -2.966,-4.47 -0.347,-4.47 -0.347,-4.561 ; -3.139,-4.547 -3.139,-5.414 -2.272,-5.414 ; -3.139,-4.547 -2.792,-4.894 ; -2.917,-12.377 -2.917,-11.473 ; -2.792,-4.894 -2.792,-4.817 -2.779,-4.804 -0.842,-4.804 -0.723,-4.923 ; -2.792,-4.894 -2.792,-4.951 -2.85,-5.009 -2.677,-5.009 ; -2.792,-4.894 -2.677,-5.009 ; -2.677,-5.009 -0.996,-5.009 -0.938,-5.067 -0.867,-5.067 -0.723,-4.923 ; -2.677,-5.009 -2.272,-5.414 ; -2.272,-5.414 -1.085,-5.414 -1.021,-5.478 -0.752,-5.478 -0.335,-5.061 -0.585,-5.061 -0.723,-4.923 ; -2.272,-5.414 -1.836,-5.85 ; -1.836,-5.85 -0.791,-5.85 -0.259,-5.318 0.038,-5.318 0.076,-5.28 0.076,-4.99 -0.347,-4.567 -0.347,-4.561 ; -1.836,-5.85 -1.666,-6.02 -1.406,-6.28 ; -1.406,-6.28 -1.401,-6.285 -1.092,-6.594 -1.135,-6.594 -1.182,-6.641 ; -1.406,-6.28 -0.521,-6.28 -0.261,-6.02 0.191,-5.568 ; -1.182,-6.641 -0.704,-6.641 -0.324,-6.641 ; -0.723,-4.923 -0.354,-4.554 -0.347,-4.561 ; -0.347,-4.561 0.361,-5.269 ; -0.324,-6.641 0.191,-6.126 0.191,-6.02 0.191,-5.568 ; -0.324,-6.641 0.023,-6.641 ; 0.023,-6.641 0.301,-6.363 0.693,-6.363 ; 0.023,-6.641 0.447,-6.641 ; 0.191,-5.568 0.426,-5.333 ; 0.191,-5.568 0.191,-5.439 0.361,-5.269 ; 0.361,-5.269 0.426,-5.333 ; 0.361,-5.269 0.433,-5.198 ; 0.426,-5.333 0.433,-5.341 0.433,-6.02 0.433,-6.102 0.693,-6.363 ; 0.426,-5.333 0.433,-5.326 0.433,-5.198 ; 0.447,-6.641 0.709,-6.379 ; 0.447,-6.641 0.971,-6.641 0.709,-6.379 ; 0.693,-6.363 0.709,-6.379 ; 8.687,4.417 9.053,4.051 10.14,4.051 10.14,4.433 ; 8.687,4.417 8.703,4.433 ; 8.703,4.433 10.14,4.433 ; 10.14,4.433 10.14,4.5 10.157,4.517 9.22,4.517 9.423,4.72 9.423,5.012 10.151,5.012 ; 10.14,4.433 10.313,4.433 10.151,4.595 10.151,5.012 ; 10.151,5.012 10.151,5.346 ; 10.151,5.012 10.372,5.012 10.384,5 11.011,5.627 11.13,5.627 11.13,7.382 10.79,7.722 10.79,8.002 10.742,8.05 9.549,8.05 9.549,7.442 9.19,7.083 9.19,6.104 9.37,5.924 9.37,5.346 10.151,5.346 ; 10.151,5.346 10.151,5.703 ; 10.151,5.346 10.187,5.346 10.229,5.304 10.246,5.304 10.784,5.842 10.784,7.108 10.342,7.55 10.342,7.644 10.318,7.668 9.943,7.668 9.943,7.268 9.537,6.862 9.537,6.17 9.62,6.087 9.62,5.788 9.716,5.692 10.14,5.692 10.151,5.703 ; 10.151,5.703 10.151,6.045 10.038,6.045 9.984,5.991 9.865,6.11 9.865,6.23 9.895,6.26 9.895,6.911 10.175,7.191 10.361,7.005 10.665,7.005 10.457,6.797 10.414,6.797 10.384,6.767 10.384,5.936 10.151,5.703 ; 19.711,-13.857 21.689,-13.857 ; 19.711,-13.857 16.787,-13.857 16.314,-13.384 17.665,-13.384 18.023,-13.742 19.06,-13.742 19.418,-13.384 19.418,-13.564 19.711,-13.857
  Bottom Layer w0.635: v1(-3.042,-9.656) v1@-1.775,-9.656 ; v1@-2.591,-9.373 -2.531,-9.433 1.369,-9.433 ; v1@-2.021,-10.052 -3.469,-10.052 -3.469,-9.171 -3.693,-8.948 1.443,-8.948 1.369,-9.021 1.369,-9.433 ; v1@7.811,9.673 10.801,9.673 11.668,9.673 11.885,9.456 11.949,9.519 12.161,9.731 v1(12.161,10.17) v1(10.801,10.17) ; v1(8.102,10.147) v1(9.463,10.147) ; v1(10.222,-0.567) 10.236,-0.581 v1(11.55,-0.581) ; v1@-1.775,-9.656 0.178,-9.656 0.296,-9.774 ; v1@-1.775,-9.656 v1(-1.737,-9.694) -1.737,-10.072 -1.267,-10.542 -0.499,-9.774 0.296,-9.774 ; 0.296,-9.774 1.369,-9.774 1.369,-9.433